# Altium PCB ZD-STM32-ZOUYU.PcbDoc (part 2 of 8)
Units mm, origin at the board's own origin, x right, y up, seen from the top; angles counter-clockwise.
Board outline 251.84 x 139.06 mm, 2 copper layers (Top Layer, Bottom Layer); 254 components, 246 nets, 1172 pads, 599 vias.
Unrouted connection lines stored in the file: 9.
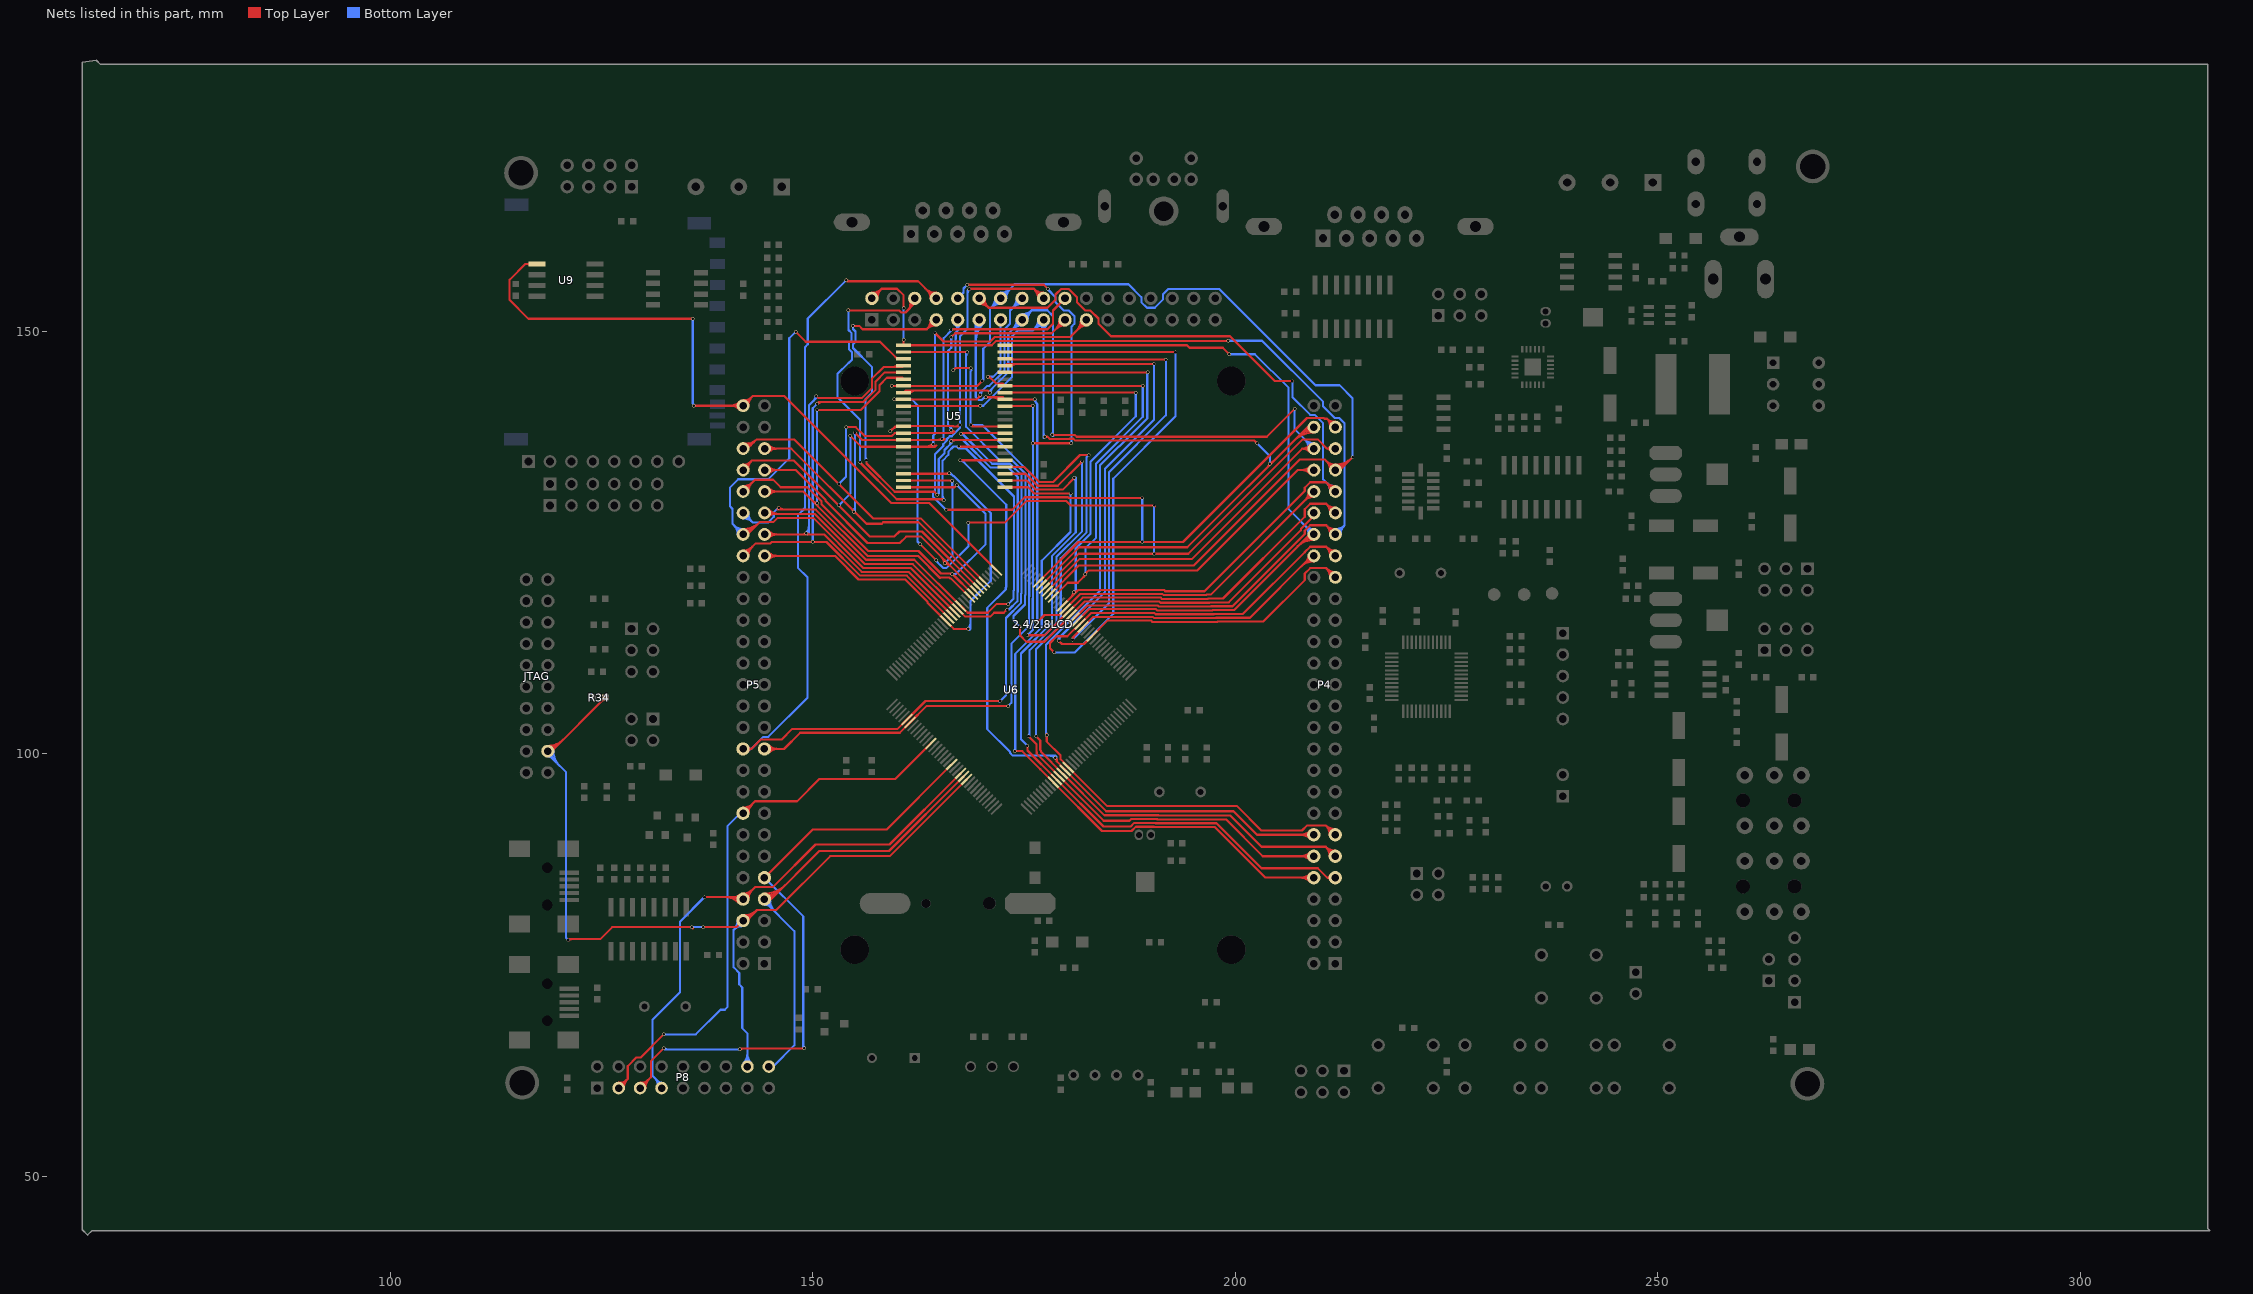
[diagram p2: the nets of this part, all layers, seen from the top]

## Via types
v1: diameter 0.4, hole 0.3, Top Layer to Bottom Layer, 598 vias
v2: diameter 0.3, hole 0.2, Top Layer to Bottom Layer, 1 vias

## Nets (pads, with @x,y where several pads share a name; then routed paths per layer and width w, separated by ;. In a path a pad name is that pad's centre, name@x,y a point inside that pad or via, vN(x,y) a via of type N, cw(c..) or ccw(c..) an arc to the next point about the centre after c; other vN are vias at no path point) (continued)
"F CS": P5.54 U6.73 U9.1 | length 92.8
  Top Layer w0.254: U9.1@116.511,157.862 ccw(c116.208,157.559) 116.208,157.988 ccw(c116.208,158.417) U9.1@116.511,158.114 ; U9.1@117.348,157.988 115.946,157.988 114.098,156.141 114.098,153.725 116.312,151.511 v1(135.763,151.511) ; v1(135.89,141.224) P5.54@141.732,141.224 142.875,142.367 146.614,142.367 157.048,131.933 157.048,131.921 159.267,129.702 163.778,129.702 U6.73@171.73,121.749 ; P5.54@141.283,140.775 ccw(c140.199,139.691) 140.199,141.224 ccw(c140.199,142.757) P5.54@141.283,141.673 ; P5.54@141.463,140.955 ccw(c140.812,140.304) 140.812,141.224 ccw(c140.812,142.144) P5.54@141.463,141.493 ; P5.54@141.732,141.605 ccw(c141.732,142.525) 142.382,141.874 ccw(c143.033,141.224) P5.54@142.113,141.224 ; P5.54@141.732,141.859 ccw(c141.732,143.392) 142.816,142.308 ccw(c143.9,141.224) P5.54@142.367,141.224
  Bottom Layer w0.254: 135.763,141.478 v1(135.763,151.511) ; 135.763,141.707 ccw(c136.373,141.707) v1@135.942,141.276
"FIFO OE": P5.8 P8.7 U6.132 | length 73.8
  Top Layer w0.254: v1(137.16,83.058) 141.478,83.058 P5.8@141.721,82.815 143.147,84.24 145.25,84.24 150.291,89.281 159.061,89.281 U6.132@167.488,97.708 ; 139.54,83.058 cw(c139.54,80.633) P5.8@141.254,82.348 ; 140.153,83.058 cw(c140.153,81.247) P5.8@141.434,82.527 ; 140.714,83.058 ccw(c140.714,83.822) P5.8@141.254,83.282 ; 140.766,83.058 cw(c140.766,81.86) P5.8@141.613,82.707 ; P5.8@141.721,83.221 ccw(c141.721,84.202) 142.415,83.509 ccw(c143.109,82.815) P5.8@142.128,82.815 ; P5.8@141.721,83.475 ccw(c141.721,85.07) 142.849,83.942 ccw(c143.976,82.815) P5.8@142.382,82.815
  Bottom Layer w0.254: 131.225,61.693 cw(c130.049,60.517) P8.7@131.711,60.464 ; 131.64,61.278 cw(c130.852,60.491) P8.7@131.965,60.456 ; 131.675,61.243 ccw(c132.08,61.647) P8.7@132.08,61.075 ; P8.7@132.08,60.452 132.08,60.838 131.003,61.915 131.003,68.519 134.258,71.774 134.258,80.156 v1(137.16,83.058)
"FIFO RCLK": JTAG.3 P5.6 P8.16 R34.2 U6.134 | length 129.9
  Top Layer w0.254: JTAG.3@118.618,100.33 119.064,100.33 R34.2@125.412,106.678 ; JTAG.3@118.655,100.445 ccw(c118.655,101.709) 119.549,100.815 ; JTAG.3@118.655,100.699 ccw(c118.655,102.577) 119.983,101.249 ; JTAG.3@118.655,100.953 ccw(c118.655,103.444) 120.417,101.683 ; JTAG.3@119.278,100.33 cw(c119.796,100.33) 119.43,100.696 ; v1(121.031,77.978) 121.128,78.075 124.811,78.075 126.238,79.502 v1(135.636,79.502) v1@135.763,79.375 ; v1@121.083,77.926 cw(c121.441,77.568) 121.441,78.075 ; R34.2@125.158,106.678 cw(c124.545,106.678) 124.979,106.245 cw(c125.412,105.811) R34.2@125.412,106.424 ; v1(137.033,79.502) 140.948,79.502 P5.6@141.721,80.275 142.124,80.275 143.383,81.534 ; P5.6@141.732,80.427 ccw(c141.813,81.534) 142.598,80.749 ; P5.6@141.751,80.68 ccw(c141.867,82.265) 142.99,81.141 ; P5.6@141.769,80.933 ccw(c141.92,82.997) 143.383,81.534 ; P5.6@142.382,80.275 cw(c143.004,80.275) 142.564,80.715 ; U6.134@168.195,97.001 159.097,87.903 152.038,87.903 145.669,81.534 143.383,81.534
  Bottom Layer w0.254: JTAG.3@118.618,100.33 118.618,99.981 120.777,97.822 120.777,78.232 v1(121.031,77.978) ; JTAG.3@118.655,99.707 cw(c118.655,99.135) 119.06,99.539 ; JTAG.3@118.77,100.33 ccw(c119.98,100.33) 119.125,99.475 ; JTAG.3@119.024,100.33 ccw(c120.847,100.33) 119.558,99.041 ; JTAG.3@119.278,100.33 ccw(c121.714,100.33) 119.992,98.608 ; v1(135.636,79.502) v1(137.033,79.502) 137.287,79.502 ; P5.6@141.061,80.269 cw(c139.511,80.257) 140.607,79.16 ; P5.6@141.315,80.271 cw(c140.361,80.264) 141.035,79.589 cw(c141.71,78.915) P5.6@141.718,79.868 ; P5.6@141.716,79.614 ccw(c141.703,78.064) 140.607,79.16 ; P5.6@141.721,80.275 140.607,79.16 ; P8.16@141.799,63.433 ccw(c140.736,64.496) 142.24,64.496 ccw(c143.744,64.496) P8.16@142.681,63.433 ; P8.16@141.979,63.253 ccw(c141.349,63.883) 142.24,63.883 ccw(c143.131,63.883) P8.16@142.501,63.253 ; P8.16@142.24,62.992 142.24,66.929 141.624,67.545 141.624,72.364 141.267,72.721 141.267,74.073 140.607,74.733 140.607,79.16
"FIFO RRST": P5.9 P8.5 U6.129 | length 77.7
  Top Layer w0.254: P8.5@129.54,60.452 130.81,61.722 130.81,63.627 v1(132.334,65.151) ; P8.5@129.54,60.821 ccw(c129.54,61.712) 130.17,61.082 ccw(c130.8,60.452) P8.5@129.909,60.452 ; P8.5@129.54,61.075 ccw(c129.54,62.579) 130.604,61.516 ccw(c131.667,60.452) P8.5@130.163,60.452 ; v1(141.351,65.024) 141.478,65.151 v1(148.971,65.151) ; v1@141.403,64.972 cw(c141.834,64.541) 141.834,65.151 ; P5.9@144.261,85.355 149.965,91.059 158.718,91.059 U6.129@166.427,98.769
  Bottom Layer w0.254: v1(132.334,65.151) 132.461,65.024 v1(141.351,65.024) ; v1@132.386,65.203 ccw(c132.817,65.634) 132.817,65.024 ; P5.9@144.261,85.355 148.844,80.772 148.844,65.278 v1(148.971,65.151) ; 148.844,65.634 ccw(c149.454,65.634) v1@149.023,65.203
"FIFO WEN": P5.7 P8.18 U6.133 | length 65
  Top Layer w0.254: P5.7@144.261,82.713 ccw(c144.261,84.36) 145.425,83.195 ; P5.7@144.261,82.815 145.045,82.815 150.749,88.519 159.006,88.519 U6.133@167.841,97.354 ; P5.7@144.261,82.967 ccw(c144.261,85.227) 145.859,83.629 ; P5.7@144.261,83.221 ccw(c144.261,86.094) 146.293,84.063 ; P5.7@144.261,83.475 ccw(c144.261,86.961) 146.726,84.496
  Bottom Layer w0.254: P5.7@144.261,82.154 cw(c144.261,81.173) 144.955,81.867 ; P5.7@144.261,82.815 144.261,82.561 147.797,79.025 147.797,65.518 145.271,62.992 P8.18@144.78,62.992 ; P5.7@144.414,82.815 ccw(c145.395,82.815) 144.701,82.121 ; P5.7@144.668,82.815 ccw(c146.262,82.815) 145.135,81.687 ; P5.7@144.922,82.815 ccw(c147.129,82.815) 145.568,81.254
"FIFO WRST": P5.16 P8.3 U6.122 | length 75.1
  Top Layer w0.254: P8.3@127,60.452 128.077,61.529 128.077,63.052 129.094,64.069 129.601,64.069 v1(132.334,66.802) ; P8.3@127,60.821 ccw(c127,61.712) 127.63,61.082 ccw(c128.26,60.452) P8.3@127.369,60.452 ; P8.3@127,61.075 ccw(c127,62.579) 128.064,61.516 ccw(c129.127,60.452) P8.3@127.623,60.452 ; P5.16@141.721,92.975 143.147,94.4 148.121,94.4 150.749,97.028 159.737,97.028 U6.122@163.952,101.243 ; P5.16@141.721,93.381 ccw(c141.721,94.362) 142.415,93.669 ccw(c143.109,92.975) P5.16@142.128,92.975 ; P5.16@141.721,93.635 ccw(c141.721,95.23) 142.849,94.102 ccw(c143.976,92.975) P5.16@142.382,92.975
  Bottom Layer w0.254: v1(132.334,66.802) 136.144,66.802 139.063,69.721 139.554,69.721 139.863,70.03 139.863,91.459 141.379,92.975 P5.16@141.721,92.975
"FSMC A0": P4.10 U5.1 U6.10 | length 87.7
  Top Layer w0.254: U5.1@172.729,131.571 175.474,131.571 176.21,130.836 v1(180.493,130.836) ; v1(173.863,100.33) 174.765,100.33 176.911,98.184 U6.10@178.448,96.647 184.22,90.875 187.713,90.875 188.224,91.386 190.338,91.386 190.376,91.348 197.57,91.348 203.563,85.355 P4.10@209.285,85.355 ; P4.10@208.818,84.888 ccw(c207.691,83.76) 207.691,85.355 ccw(c207.691,86.949) P4.10@208.818,85.822 ; P4.10@208.998,85.067 ccw(c208.304,84.374) 208.304,85.355 ccw(c208.304,86.336) P4.10@208.998,85.642
  Bottom Layer w0.254: v1@173.811,100.382 ccw(c173.511,100.682) 173.936,100.682 ; v1(173.863,100.33) 173.936,100.403 173.936,111.85 177.076,114.99 177.076,122.861 180.493,126.278 v1(180.493,130.836)
"FSMC A1": P4.9 U5.2 U6.11 | length 89.1
  Top Layer w0.254: U5.2@172.729,132.371 175.316,132.371 176.398,131.29 179.55,131.29 v1@180.975,132.715 ; v1(175.387,100.965) 175.387,100.415 U6.11@178.801,97.001 184.383,91.419 187.615,91.419 188.036,91.84 190.526,91.84 190.564,91.802 197.758,91.802 203.091,86.469 209.747,86.469 210.861,85.355 ; P4.9@211.209,85.116 ccw(c210.861,84.981) 210.861,85.355 ; P4.9@211.209,85.593 cw(c210.861,85.728) 210.861,85.355 ; P4.9@211.825,85.355 210.861,85.355
  Bottom Layer w0.254: v1(175.387,100.965) 174.625,101.727 174.625,111.897 178.308,115.58 178.308,123.451 181.102,126.245 v1@181.102,132.715 ; v1@180.884,132.624 cw(c180.356,132.096) 181.102,132.096
  other v1: 180.935,132.675
"FSMC A2": P4.12 U5.3 U6.12 | length 91.4
  Top Layer w0.254: U5.3@172.729,133.171 175.158,133.171 176.586,131.744 178.988,131.744 v1(181.864,134.62) v1@181.744,134.62 ; v1(175.514,102.108) 176.457,101.165 176.457,100.052 176.53,99.979 ; 176.53,100.203 176.53,99.979 ; P4.12@208.818,87.428 ccw(c207.691,86.3) 207.691,87.895 ccw(c207.691,89.489) P4.12@208.818,88.362 ; P4.12@208.998,87.607 ccw(c208.304,86.914) 208.304,87.895 ccw(c208.304,88.876) P4.12@208.998,88.182 ; P4.12@209.285,87.895 203.246,87.895 198.885,92.256 190.752,92.256 190.714,92.294 187.664,92.294 187.46,92.09 184.419,92.09 U6.12@179.155,97.354 176.53,99.979
  Bottom Layer w0.254: v1@175.462,102.16 ccw(c175.031,102.591) 175.641,102.591 ; v1(175.514,102.108) 175.641,102.235 175.641,112.271 178.816,115.446 178.816,123.317 181.864,126.365 v1(181.864,134.62)
"FSMC A3": P4.11 U5.4 U6.13 | length 93.8
  Top Layer w0.254: U5.4@172.729,133.971 175,133.971 176.774,132.198 178.426,132.198 181.61,135.382 v1(182.626,135.382) ; v1(176.403,102.108) 176.911,101.6 176.911,100.464 176.984,100.391 176.984,100.257 179.509,97.732 U6.13@179.509,97.708 179.533,97.708 184.493,92.748 190.902,92.748 190.94,92.71 199.39,92.71 203.091,89.009 210.711,89.009 ; P4.11@211.165,87.9 ccw(c209.615,87.913) 210.711,89.009 ; P4.11@211.419,87.898 ccw(c210.465,87.906) 211.139,88.581 ccw(c211.814,89.255) P4.11@211.822,88.301 ; P4.11@211.82,88.555 cw(c211.807,90.105) 210.711,89.009 ; P4.11@211.825,87.895 210.711,89.009
  Bottom Layer w0.254: v1(176.403,102.108) 176.403,112.391 179.324,115.312 179.324,123.183 182.391,126.25 182.391,135.147 v1(182.626,135.382)
"FSMC A4": P4.14 U5.5 U6.14 | length 91.1
  Top Layer w0.254: v1@167.386,134.747 v1(167.41,134.771) U5.5@172.729,134.771 ; v1@178.647,99.508 cw(c178.355,99.095) 178.861,99.095 ; v1(178.689,99.568) 178.861,99.396 178.861,99.127 179.862,98.126 U6.14@179.862,98.061 184.706,93.218 199.771,93.218 202.554,90.435 P4.14@209.285,90.435 ; P4.14@208.818,89.968 ccw(c207.691,88.84) 207.691,90.435 ccw(c207.691,92.029) P4.14@208.818,90.902 ; P4.14@208.998,90.147 ccw(c208.304,89.454) 208.304,90.435 ccw(c208.304,91.416) P4.14@208.998,90.722
  Bottom Layer w0.254: v1@167.41,134.698 cw(c167.41,133.993) 167.909,134.492 ; v1(167.41,134.771) 167.63,134.771 172.885,129.516 172.885,119.771 172.812,119.698 172.812,119.472 170.634,117.294 170.634,102.941 173.336,100.239 173.336,100.112 173.645,99.803 178.581,99.803 v1@178.816,99.568 ; 177.945,99.803 cw(c177.945,98.824) v1@178.637,99.516 ; 178.559,99.803 cw(c178.559,99.438) v1@178.817,99.696 ; v1(178.689,99.568) v1@178.816,99.568 ; v1@178.752,99.504 v1@178.816,99.568
"FSMC A5": P4.13 U5.18 U6.15 | length 110.1
  Top Layer w0.254: U5.18@172.729,145.171 v1@189.601,145.171 ; v1@177.673,102.362 v1(177.673,102.235) 177.673,101.456 179.315,99.814 179.315,99.381 180.216,98.48 U6.15@180.216,98.415 180.223,98.415 184.785,93.853 200.152,93.853 203.073,90.932 207.884,90.932 208.502,91.549 210.711,91.549 ; 189.41,145.171 cw(c189.41,144.96) v1@189.559,145.109 ; P4.13@211.165,90.44 ccw(c209.615,90.453) 210.711,91.549 ; P4.13@211.419,90.438 ccw(c210.465,90.446) 211.139,91.121 ccw(c211.814,91.795) P4.13@211.822,90.841 ; P4.13@211.82,91.095 cw(c211.807,92.645) 210.711,91.549 ; P4.13@211.825,90.435 210.711,91.549
  Bottom Layer w0.254: 177.581,102.633 ccw(c178.071,102.633) v1@177.725,102.287 ; v1(177.673,102.235) 177.581,102.327 177.581,112.927 183.969,119.315 183.969,134.185 186.182,136.398 186.267,136.398 189.569,139.7 189.569,145.119 v1(189.611,145.161) ; 189.569,144.882 cw(c189.89,144.882) v1@189.663,145.109
"FSMC A6": P4.37 U5.19 U6.50 | length 99
  Top Layer w0.254: U5.19@172.729,145.971 172.93,146.172 v1@190.373,146.172 ; U5.19@173.276,146.069 cw(c173.465,145.949) 173.465,146.172 ; U5.19@173.301,146.099 cw(c173.476,145.924) 173.476,146.172 ; U5.19@173.481,145.92 cw(c174.089,145.311) 174.089,146.172 ; U5.19@173.491,145.932 cw(c173.928,145.652) 173.928,146.172 ; v1(179.07,113.411) 179.47,113.011 182.084,113.011 U6.50@183.044,113.971 184.849,115.776 190.037,115.776 190.192,115.621 197.846,115.621 197.901,115.675 203.305,115.675 208.207,120.577 208.207,121.355 208.845,121.993 210.747,121.993 P4.37@211.836,120.904 ; P4.37@211.201,120.904 ccw(c209.668,120.904) 210.752,121.988 ccw(c211.836,123.072) P4.37@211.836,121.539 ; P4.37@211.455,120.904 ccw(c210.535,120.904) 211.186,121.554 ccw(c211.836,122.205) P4.37@211.836,121.285
  Bottom Layer w0.254: v1(179.07,113.411) 179.07,113.665 184.585,119.18 184.585,133.785 190.373,139.573 v1(190.373,146.177) ; v1@179.143,113.411 cw(c179.932,113.411) 179.374,113.969
"FSMC A7": P4.40 U5.20 U6.53 | length 94.4
  Top Layer w0.254: U5.20@172.729,146.771 172.796,146.704 191.751,146.704 v1(191.77,146.685) ; U5.20@173.481,146.823 ccw(c173.768,147.11) 173.768,146.704 ; v1(180.721,113.538) 180.721,113.769 U6.53@181.983,115.032 183.181,116.23 190.225,116.23 190.38,116.075 197.658,116.075 197.713,116.129 201.727,116.129 209.042,123.444 P4.40@209.296,123.444 ; v1@180.794,113.538 cw(c181.529,113.538) 181.009,114.058 ; 191.548,146.704 cw(c191.548,146.463) v1@191.718,146.633 ; 207.778,122.18 cw(c209.296,120.663) P4.40@209.296,122.809 ; 208.212,122.614 cw(c209.296,121.53) P4.40@209.296,123.063 ; 208.392,122.794 ccw(c207.741,123.444) P4.40@208.661,123.444
  Bottom Layer w0.254: v1(180.721,113.538) 185.039,117.856 185.039,133.35 191.77,140.081 v1(191.77,146.685)
"FSMC A8": P4.39 U5.21 U6.54 | length 107.4
  Top Layer w0.254: U5.21@172.729,147.571 v1(192.913,147.571) ; v1(178.562,112.014) 178.054,112.522 178.054,113.14 178.852,113.938 180.117,113.938 181.565,115.385 U6.54@181.63,115.385 182.928,116.684 190.413,116.684 190.568,116.529 197.47,116.529 197.525,116.583 200.911,116.583 208.207,123.879 208.207,123.895 208.845,124.533 210.747,124.533 P4.39@211.836,123.444 ; P4.39@211.201,123.444 ccw(c209.668,123.444) 210.752,124.528 ccw(c211.836,125.612) P4.39@211.836,124.079 ; P4.39@211.455,123.444 ccw(c210.535,123.444) 211.186,124.094 ccw(c211.836,124.745) P4.39@211.836,123.825
  Bottom Layer w0.254: v1(178.562,112.014) 180.975,112.014 185.547,116.586 185.547,132.595 192.913,139.961 v1(192.913,147.571)
"FSMC A9": P4.42 U5.22 U6.55 | length 95.8
  Top Layer w0.254: U5.22@172.729,148.371 194.275,148.371 194.564,148.082 198.501,148.082 v1(199.263,147.32) ; U6.55@181.276,115.739 182.675,117.138 190.602,117.138 190.756,116.983 197.282,116.983 197.337,117.037 199.848,117.037 208.795,125.984 P4.42@209.296,125.984 ; 207.357,124.546 cw(c209.296,122.607) P4.42@209.296,125.349 ; 207.79,124.979 cw(c209.296,123.474) P4.42@209.296,125.603 ; 208.224,125.413 cw(c209.296,124.341) P4.42@209.296,125.857 ; 208.566,125.755 ccw(c208.337,125.984) P4.42@208.661,125.984
  Bottom Layer w0.254: v1(199.263,147.32) 202.311,147.32 206.302,143.329 206.302,128.978 P4.42@209.296,125.984 ; P4.42@208.661,125.984 ccw(c207.128,125.984) 208.212,127.068 ccw(c209.296,128.152) P4.42@209.296,126.619 ; P4.42@208.915,125.984 ccw(c207.995,125.984) 208.646,126.634 ccw(c209.296,127.285) P4.42@209.296,126.365
"FSMC A10": 2.4/2.8LCD.2 P4.41 U5.23 U6.56 | length 129.1
  Top Layer w0.254: 2.4/2.8LCD.2@156.972,153.924 158.115,155.067 159.945,155.067 160.729,154.283 v1@160.729,152.908 ; 2.4/2.8LCD.2@156.972,154.33 ccw(c156.972,155.312) 157.666,154.618 ccw(c158.36,153.924) 2.4/2.8LCD.2@157.378,153.924 ; 2.4/2.8LCD.2@156.972,154.584 ccw(c156.972,156.179) 158.099,155.051 ccw(c159.227,153.924) 2.4/2.8LCD.2@157.632,153.924 ; U5.23@160.729,148.371 v1(160.729,149.045) v1@160.782,149.098 ; U5.23@160.729,148.371 171.166,148.371 171.694,148.898 199.117,148.898 v1(199.136,148.917) ; U6.56@180.923,116.093 180.988,116.093 182.487,117.592 190.79,117.592 190.944,117.437 197.094,117.437 197.149,117.491 199.66,117.491 208.207,126.038 208.207,126.435 208.845,127.073 210.747,127.073 P4.41@211.836,125.984 ; 198.915,148.898 ccw(c198.915,149.138) v1@199.084,148.969 ; P4.41@211.201,125.984 ccw(c209.668,125.984) 210.752,127.068 ccw(c211.836,128.152) P4.41@211.836,126.619 ; P4.41@211.455,125.984 ccw(c210.535,125.984) 211.186,126.634 ccw(c211.836,127.285) P4.41@211.836,126.365
  Bottom Layer w0.254: v1(160.729,149.045) v1@160.729,152.908 ; v1(199.136,148.917) 203.143,148.917 210.385,141.675 210.385,141.135 211.747,139.773 212.287,139.773 212.925,139.135 212.925,127.073 P4.41@211.836,125.984 ; P4.41@211.836,126.365 ccw(c211.836,127.285) 212.486,126.634 ccw(c213.137,125.984) P4.41@212.217,125.984 ; P4.41@211.836,126.619 ccw(c211.836,128.152) 212.92,127.068 ccw(c214.004,125.984) P4.41@212.471,125.984
  other v1: 160.729,152.781
"FSMC A11": P4.44 U5.24 U6.57 | length 88.2
  Top Layer w0.254: U5.24@160.729,147.571 v1(168.272,147.571) v1@168.275,147.574 ; v1(174.498,115.062) 174.498,114.046 175.26,113.284 177.407,113.284 U6.57@180.569,116.446 182.169,118.046 190.978,118.046 191.132,117.891 196.906,117.891 196.961,117.945 199.225,117.945 207.753,126.473 207.753,126.623 209.296,128.166 P4.44@209.296,128.524
  Bottom Layer w0.254: 168.129,147.049 cw(c168.795,147.049) v1@168.324,147.52 ; v1(168.272,147.571) 168.129,147.428 168.129,138.72 172.048,134.801 173.516,134.801 175.155,133.162 175.155,118.831 175.098,118.774 175.098,118.364 175.098,117.694 173.736,116.332 173.736,115.824 v1(174.498,115.062)
"FSMC A12": P5.42 U5.25 U6.87 | length 83.7
  Top Layer w0.254: P5.42@141.732,125.984 142.24,125.984 143.691,127.435 145.304,127.435 145.812,127.943 150.032,127.943 155.963,122.012 161.568,122.012 U6.87@166.781,116.8 ; P5.42@141.732,126.111 ccw(c141.732,127.644) 142.816,126.56 ; P5.42@141.732,126.365 ccw(c141.732,128.511) 143.25,126.994 ; P5.42@141.732,126.619 ccw(c141.732,129.378) 143.683,127.427 ; v1(147.955,149.987) 149.143,148.799 157.938,148.799 159.967,146.771 U5.25@160.729,146.771 ; 159.798,146.94 ccw(c160.029,147.171) U5.25@160.029,146.844
  Bottom Layer w0.254: P5.42@141.097,125.984 ccw(c139.564,125.984) 140.648,127.068 ccw(c141.732,128.152) P5.42@141.732,126.619 ; P5.42@141.351,125.984 ccw(c140.431,125.984) 141.082,126.634 ccw(c141.732,127.285) P5.42@141.732,126.365 ; P5.42@141.732,125.984 140.481,127.235 140.481,129.003 140.189,129.295 140.189,131.553 141.151,132.515 144.723,132.515 147.193,134.985 147.193,149.225 v1(147.955,149.987)
"FSMC A13": P5.41 U5.26 U6.88 | length 63.1
  Top Layer w0.254: P5.41@144.272,125.984 151.349,125.984 155.775,121.558 161.315,121.558 U6.88@166.427,116.446 ; P5.41@144.541,125.715 cw(c145.192,125.064) 145.192,125.984 cw(c145.192,126.904) P5.41@144.541,126.253 ; P5.41@144.721,125.535 cw(c145.805,124.451) 145.805,125.984 cw(c145.805,127.517) P5.41@144.721,126.433 ; 148.742,125.984 ccw(c148.742,126.594) v1@149.173,126.163 ; v1@149.277,126.163 ccw(c149.708,126.594) 149.708,125.984 ; v1(150.368,142.367) 150.617,142.118 155.78,142.118 156.967,143.305 156.967,144.394 158.369,145.796 160.554,145.796 U5.26@160.729,145.971 ; 159.429,145.796 ccw(c159.429,146.571) U5.26@159.977,146.023
  Bottom Layer w0.254: v1@149.173,126.163 ccw(c148.351,126.985) 149.514,126.985 ; v1(149.225,126.111) 149.409,126.111 149.514,126.216 149.514,141.242 150.368,142.096 v1(150.368,142.367) ; v1@149.353,125.983 ccw(c148.964,126.372) 149.514,126.372 ; 150.052,141.78 ccw(c149.465,142.367) v1@150.295,142.367
"FSMC A14": P5.40 U5.27 U6.89 | length 62.8
  Top Layer w0.254: P5.40@141.732,123.444 143.183,124.895 144.923,124.895 145.123,125.095 151.596,125.095 155.587,121.104 161.101,121.104 166.074,116.132 U6.89@166.074,116.093 ; P5.40@141.732,123.825 ccw(c141.732,124.745) 142.382,124.094 ccw(c143.033,123.444) P5.40@142.113,123.444 ; P5.40@141.732,124.079 ccw(c141.732,125.612) 142.816,124.528 ccw(c143.9,123.444) P5.40@142.367,123.444 ; 149.746,125.095 ccw(c149.746,125.336) v1@149.916,125.166 ; v1@150.02,125.166 ccw(c150.19,125.336) 150.19,125.095 ; v1(150.495,141.478) 150.681,141.664 155.968,141.664 157.421,143.117 157.421,144.086 158.506,145.171 U5.27@160.729,145.171 ; v1@150.547,141.426 cw(c151.12,140.853) 151.12,141.664
  Bottom Layer w0.254: v1@149.987,125.095 v1(149.968,125.114) 149.968,140.934 150.495,141.461 v1(150.495,141.478) ; 150.359,141.325 ccw(c150.205,141.478) v1@150.422,141.478
"FSMC A15": P5.39 U5.42 U6.90 | length 60.5
  Top Layer w0.254: P5.39@144.272,123.444 152.605,123.444 155.399,120.65 160.913,120.65 163.56,118.003 163.56,117.899 U6.90@165.72,115.739 166.651,114.808 v1(168.402,114.808) ; P5.39@144.541,123.175 cw(c145.192,122.524) 145.192,123.444 cw(c145.192,124.364) P5.39@144.541,123.713 ; P5.39@144.721,122.995 cw(c145.805,121.911) 145.805,123.444 cw(c145.805,124.977) P5.39@144.721,123.893 ; U5.42@160.729,133.171 166.064,133.171 v1(166.116,133.223) ; 165.815,133.171 ccw(c165.815,133.524) v1@166.064,133.275
  Bottom Layer w0.254: v1@166.116,133.15 cw(c166.116,132.56) 166.533,132.977 ; v1(166.116,133.223) 166.287,133.223 166.628,132.882 166.694,132.882 171.052,128.524 171.052,120.506 168.656,118.11 168.656,114.808 ; v1@168.35,114.86 ccw(c167.613,115.597) 168.656,115.597 ; v1@168.53,114.68 ccw(c168.226,114.984) 168.656,114.984
"FSMC A16": P5.47 U5.43 U6.80 | length 54.2
  Top Layer w0.254: P5.47@144.272,133.604 147.945,133.604 151.476,130.073 151.476,129.956 156.464,124.968 160.274,124.968 161.029,125.723 162.807,125.723 U6.80@169.256,119.275 ; P5.47@144.541,133.335 cw(c145.192,132.684) 145.192,133.604 cw(c145.192,134.524) P5.47@144.541,133.873 ; P5.47@144.721,133.155 cw(c145.805,132.071) 145.805,133.604 cw(c145.805,135.137) P5.47@144.721,134.053 ; U5.43@160.729,132.371 v1@166.497,132.371 ; 165.224,123.306 cw(c164.473,122.555) v1@165.535,122.555 ; v1@165.608,122.482 cw(c165.608,121.42) 166.359,122.171 ; v1@165.608,122.736 cw(c165.608,122.287) 165.926,122.604 ; 165.657,122.873 cw(c165.34,122.555) v1@165.789,122.555 ; 166.23,132.371 cw(c166.23,132.067) v1@166.445,132.282
  Bottom Layer w0.254: v1(165.608,122.555) 166.497,123.444 166.497,131.589 166.478,131.608 166.478,132.315 v1(166.497,132.334) ; 166.478,132.112 cw(c166.719,132.112) v1@166.549,132.282
"FSMC A17": P5.46 U5.44 U6.81 | length 58.2
  Top Layer w0.254: P5.46@141.732,131.064 143.129,132.461 145.288,132.461 146.177,131.572 149.335,131.572 151.022,129.885 151.022,129.521 156.528,124.015 162.496,124.015 165.154,121.358 166.424,121.358 v1(166.497,121.285) ; P5.46@141.732,131.445 ccw(c141.732,132.365) 142.382,131.714 ccw(c143.033,131.064) P5.46@142.113,131.064 ; P5.46@141.732,131.699 ccw(c141.732,133.232) 142.816,132.148 ccw(c143.9,131.064) P5.46@142.367,131.064 ; U5.44@160.729,131.571 166.75,131.571 v1(167.005,131.826) ; 166.145,121.358 cw(c166.145,120.933) v1@166.445,121.233 ; v1@166.497,121.212 cw(c166.497,120.937) 166.692,121.131 ; v1@166.517,121.306 U6.81@168.902,118.921
  Bottom Layer w0.254: v1(166.497,121.285) 166.878,121.285 170.434,124.841 170.434,128.397 v1(167.005,131.826)
"FSMC A18": P5.45 U5.28 U6.82 | length 57.9
  Top Layer w0.254: P5.45@144.272,131.064 148.844,131.064 150.568,129.34 150.568,129.333 156.457,123.444 162.426,123.444 165.034,120.836 165.103,120.904 166.133,120.904 166.279,120.758 166.358,120.758 U6.82@168.548,118.567 U6.82@168.49,118.567 ; P5.45@144.541,130.795 cw(c145.192,130.144) 145.192,131.064 cw(c145.192,131.984) P5.45@144.541,131.333 ; P5.45@144.721,130.615 cw(c145.805,129.531) 145.805,131.064 cw(c145.805,132.597) P5.45@144.721,131.513 ; 149.937,129.971 ccw(c150.495,130.529) v1@150.495,129.74 ; v1(150.495,140.716) 155.662,140.716 157.875,142.929 157.875,143.651 158.75,144.526 160.574,144.526 U5.28@160.729,144.371 ; 159.48,144.526 cw(c159.48,143.822) U5.28@159.977,144.32
  Bottom Layer w0.254: v1(150.495,129.667) v1(150.495,140.716)
"FSMC D0": 2.4/2.8LCD.6 P5.44 U5.7 U6.85 | length 125
  Top Layer w0.254: P5.44@141.732,128.524 P5.44@142.094,128.524 ; v1@145.795,129.031 ccw(c146.06,129.296) 146.06,128.921 ; v1@145.975,129.211 ccw(c146.673,129.909) 146.673,128.921 ; 146.034,128.921 150.337,128.921 156.269,122.99 162.005,122.99 U6.85@167.488,117.507 167.52,117.507 168.32,116.707 170.682,116.707 171.704,117.729 v1(173.101,117.729) ; v1(154.178,152.527) 154.207,152.498 160.218,152.498 160.462,152.254 160.947,152.254 162.052,153.359 2.4/2.8LCD.6@162.052,153.924 ; v1@154.23,152.579 ccw(c154.423,152.772) 154.423,152.498 ; v1(155.575,134.503) 159.922,130.156 v1@165.373,130.156 ; 161.23,152.537 ccw(c160.508,153.258) 2.4/2.8LCD.6@161.446,153.663 ; 161.495,152.801 ccw(c160.878,153.418) 2.4/2.8LCD.6@161.679,153.763 ; 161.759,153.066 ccw(c161.248,153.577) 2.4/2.8LCD.6@161.912,153.864 ; 165.044,130.156 cw(c165.044,129.611) v1@165.429,129.996 ; v1@167.286,136.371 U5.7@172.729,136.371 ; v1@167.311,136.45 ccw(c167.499,136.638) 167.499,136.371
  Bottom Layer w0.254: P5.44@141.732,127.889 cw(c141.732,126.356) 142.816,127.44 cw(c143.9,128.524) P5.44@142.367,128.524 ; P5.44@141.732,128.143 cw(c141.732,127.223) 142.382,127.874 cw(c143.033,128.524) P5.44@142.113,128.524 ; P5.44@141.732,128.524 142.875,127.381 144.669,127.381 145.361,128.073 145.361,128.597 v1(145.923,129.159) ; v1@154.126,152.475 cw(c153.94,152.289) 154.204,152.289 ; v1@154.204,152.501 154.204,150.189 154.578,149.815 154.578,148.98 154.277,148.679 154.277,147.866 154.632,147.511 154.632,146.685 154.256,146.309 ; 154.237,146.309 152.913,144.985 152.913,142.235 155.575,139.573 v1(155.575,134.503) ; 165.349,130.544 ccw(c165.977,130.544) v1@165.533,130.1 ; v1(165.481,130.048) 165.349,130.18 165.349,134.725 166.032,135.409 166.032,135.79 166.641,136.398 v1(167.259,136.398) ; v1@167.131,136.27 ccw(c167.389,136.528) 167.389,136.163 ; 167.259,136.163 168.112,136.163 173.793,130.482 173.793,119.395 173.736,119.338 173.736,118.364 v1(173.101,117.729) ; v1@167.311,136.45 ccw(c168.003,137.142) 168.003,136.163
"FSMC D1": 2.4/2.8LCD.7 P5.43 U5.8 U6.86 | length 121.7
  Top Layer w0.254: P5.43@144.272,128.524 144.399,128.397 150.22,128.397 156.151,122.466 161.821,122.466 U6.86@167.134,117.153 168.035,116.253 170.99,116.253 171.45,116.713 172.593,116.713 v1(172.974,117.094) ; P5.43@144.541,128.793 ccw(c145.498,129.75) 145.498,128.397 ccw(c145.498,127.298) P5.43@144.721,128.075 ; P5.43@144.721,128.973 ccw(c146.112,130.364) 146.112,128.397 ; v1(154.731,150.667) 155.461,150.667 155.858,150.27 163.478,150.27 ; v1(156.337,134.747) 156.337,134.383 159.675,131.044 164.358,131.044 v1(164.719,130.683) ; 2.4/2.8LCD.7@163.932,151.379 cw(c162.382,151.366) 163.478,150.27 ; 2.4/2.8LCD.7@164.186,151.381 cw(c163.232,151.373) 163.906,150.698 cw(c164.581,150.024) 2.4/2.8LCD.7@164.589,150.978 ; 2.4/2.8LCD.7@164.587,150.724 ccw(c164.574,149.174) 163.478,150.27 ; 2.4/2.8LCD.7@164.592,151.384 163.478,150.27 ; v1(166.37,137.033) 166.37,137.16 166.381,137.171 U5.8@172.729,137.171 ; v1@166.422,136.981 cw(c166.88,136.523) 166.88,137.171
  Bottom Layer w0.254: v1@154.813,150.749 v1(154.731,150.667) 154.731,150.304 155.032,150.003 155.032,148.792 154.731,148.491 154.731,148.054 156.967,145.818 156.967,142.736 156.21,141.979 156.21,134.874 v1(156.337,134.747) ; 156.21,135.23 ccw(c156.82,135.23) v1@156.389,134.799 ; v1(164.719,130.683) 164.895,130.859 164.895,134.913 165.578,135.597 165.578,135.978 166.37,136.769 v1(166.37,137.033) 166.37,137.16 167.757,137.16 171.024,133.893 173.14,133.893 174.247,132.786 174.247,119.207 174.19,119.15 174.19,118.073 173.211,117.094 v1(172.974,117.094) ; 166.059,136.458 ccw(c165.484,137.033) v1@166.297,137.033 ; v1@166.422,136.981 cw(c166.853,136.55) 166.853,137.16
"FSMC D2": 2.4/2.8LCD.8 P5.22 U5.9 U6.114 | length 156.1
  Top Layer w0.254: P5.22@141.721,100.595 142.685,100.595 ; P5.22@142.337,100.356 cw(c142.685,100.221) 142.685,100.595 ; P5.22@142.337,100.833 ccw(c142.685,100.968) 142.685,100.595 ; v1(153.924,156.083) 154.051,155.956 162.45,155.956 164.482,153.924 2.4/2.8LCD.8@164.592,153.924 ; v1@153.976,156.135 ccw(c154.407,156.566) 154.407,155.956 ; 163.276,155.129 ccw(c164.592,156.445) 2.4/2.8LCD.8@164.592,154.584 ; 163.543,154.863 cw(c162.604,153.924) 2.4/2.8LCD.8@163.932,153.924 ; 163.71,154.696 ccw(c164.592,155.578) 2.4/2.8LCD.8@164.592,154.33 ; 163.976,154.429 cw(c163.471,153.924) 2.4/2.8LCD.8@164.186,153.924 ; v1(167.513,137.922) 167.562,137.971 U5.9@172.729,137.971 ; v1@167.565,137.87 cw(c167.809,137.626) 167.809,137.971 ; v1(172.179,106.266) 163.318,106.266 U6.114@161.124,104.072 160.022,102.97 147.547,102.97 146.286,101.709 143.8,101.709 142.685,100.595
  Bottom Layer w0.254: P5.22@141.721,100.595 142.685,100.595 ; P5.22@142.337,100.356 cw(c142.685,100.221) 142.685,100.595 ; P5.22@142.337,100.833 ccw(c142.685,100.968) 142.685,100.595 ; v1(153.924,156.083) 149.39,151.549 149.39,148.487 149.06,148.157 149.06,129.121 148.209,128.27 148.209,122.047 149.352,120.904 149.352,106.65 144.723,102.02 144.111,102.02 142.685,100.595 ; v1@167.513,137.849 cw(c167.513,137.372) 167.85,137.709 ; v1(167.513,137.922) 167.637,137.922 171.212,134.347 173.328,134.347 174.701,132.974 174.701,119.019 174.644,118.962 174.644,117.885 172.847,116.088 172.847,106.934 v1(172.179,106.266) v1@172.085,106.172
"FSMC D3": 2.4/2.8LCD.9 P5.21 U5.10 U6.115 | length 94.3
  Top Layer w0.254: P5.21@144.261,100.595 146.569,100.595 148.49,102.516 160.276,102.516 U6.115@161.477,103.718 163.423,105.664 v1(173.101,105.664) ; P5.21@144.549,100.307 cw(c145.242,99.614) 145.242,100.595 cw(c145.242,101.576) P5.21@144.549,100.882 ; P5.21@144.728,100.128 cw(c145.856,99) 145.856,100.595 cw(c145.856,102.189) P5.21@144.728,101.062 ; v1(166.624,145.415) 166.878,145.669 v1(168.656,145.669) ; v1(168.656,138.938) 168.823,138.771 U5.10@172.729,138.771 ; v1@168.708,138.99 ccw(c169.234,139.516) 169.234,138.771
  Bottom Layer w0.254: v1(166.624,145.415) 166.878,145.669 166.878,149.115 166.897,149.134 166.897,149.879 167.132,150.114 ; 2.4/2.8LCD.9@166.753,150.843 cw(c166.241,150.114) 167.132,150.114 ; 2.4/2.8LCD.9@167.132,151.384 167.132,150.114 ; 2.4/2.8LCD.9@167.511,150.843 ccw(c168.023,150.114) 167.132,150.114 ; 168.783,145.415 168.656,145.288 v1(168.656,138.938) 170.021,138.938 175.609,133.35 175.609,118.642 175.552,118.585 175.552,115.1 173.482,113.03 173.482,106.045 v1(173.101,105.664)
"FSMC D4": 2.4/2.8LCD.10 P4.43 U5.13 U6.58 | length 116.4
  Top Layer w0.254: v1(168.254,155.538) 177.329,155.538 v1(177.8,155.067) ; U5.13@172.729,141.171 175.969,141.171 v1(176.022,141.224) ; v1(175.387,114.046) 177.419,114.046 180.173,116.8 U6.58@180.216,116.8 181.916,118.5 191.166,118.5 191.321,118.345 196.718,118.345 196.772,118.399 198.536,118.399 208.207,128.07 208.207,128.975 208.845,129.613 210.747,129.613 P4.43@211.836,128.524 ; 175.719,141.171 ccw(c175.719,141.527) v1@175.97,141.276 ; v1(176.022,136.779) v1(180.594,136.779) ; P4.43@211.201,128.524 ccw(c209.668,128.524) 210.752,129.608 ccw(c211.836,130.692) P4.43@211.836,129.159 ; P4.43@211.455,128.524 ccw(c210.535,128.524) 211.186,129.174 ccw(c211.836,129.825) P4.43@211.836,128.905
  Bottom Layer w0.254: 2.4/2.8LCD.10@167.132,153.924 167.821,154.613 167.821,155.104 v1(168.254,155.538) ; v1(175.387,114.046) 176.022,114.681 176.022,118.413 176.063,118.454 176.063,141.183 v1(176.022,141.224) ; v1@175.97,136.727 cw(c175.747,136.504) 176.063,136.504 ; v1@175.97,136.831 ccw(c175.747,137.054) 176.063,137.054 ; v1@175.97,141.172 cw(c175.747,140.949) 176.063,140.949 ; v1@177.762,155.029 178.718,154.074 178.718,153.462 179.682,152.498 180.294,152.498 180.946,151.846 180.946,150.922 180.594,150.57 v1(180.594,136.779) ; v1@177.873,155.067 ccw(c178.23,155.067) 177.978,154.814
"FSMC D5": 2.4/2.8LCD.11 P4.46 U5.14 U6.59 | length 94.8
  Top Layer w0.254: v1(170.434,142.24) 170.453,142.221 172.479,142.221 U5.14@172.729,141.971 v1(176.261,141.971) v1@176.276,141.986 ; v1@170.486,142.292 ccw(c170.656,142.462) 170.656,142.221 ; 171.25,142.221 cw(c171.25,141.193) U5.14@171.977,141.92 ; 171.863,142.221 cw(c171.863,141.806) U5.14@172.157,142.099 ; v1(176.549,115.589) 177.414,116.454 179.162,116.454 U6.59@179.862,117.153 181.663,118.954 191.354,118.954 191.509,118.799 196.53,118.799 196.584,118.853 197.085,118.853 P4.46@209.296,131.064 ; P4.46@208.661,131.064 cw(c207.128,131.064) 208.212,129.98 cw(c209.296,128.896) P4.46@209.296,130.429 ; P4.46@208.915,131.064 cw(c207.995,131.064) 208.646,130.414 cw(c209.296,129.763) P4.46@209.296,130.683
  Bottom Layer w0.254: 169.272,148.824 cw(c172.232,148.824) 2.4/2.8LCD.11@170.139,150.917 ; 169.272,149.437 cw(c171.619,149.437) 2.4/2.8LCD.11@169.959,151.097 ; 169.272,150.05 cw(c171.006,150.05) 2.4/2.8LCD.11@169.78,151.276 ; 169.272,150.664 cw(c170.392,150.664) 2.4/2.8LCD.11@169.6,151.456 ; 2.4/2.8LCD.11@169.672,151.384 169.272,150.984 169.272,142.252 169.611,141.913 169.987,141.913 v1@170.314,142.24 ; 170.105,142.031 cw(c170.434,141.701) v1@170.434,142.167 ; v1(176.261,141.971) 176.261,141.73 176.549,141.442 v1(176.549,115.589) v1@176.53,115.57 ; v1@176.331,141.95 ccw(c176.703,141.837) 176.428,141.563
"FSMC D6": 2.4/2.8LCD.12 P4.45 U5.15 U6.60 | length 154.3
  Top Layer w0.254: 2.4/2.8LCD.12@169.672,153.924 170.786,152.81 ; 2.4/2.8LCD.12@169.675,153.518 cw(c169.683,152.564) 170.358,153.238 cw(c171.032,153.913) 2.4/2.8LCD.12@170.078,153.921 ; 2.4/2.8LCD.12@169.677,153.264 cw(c169.69,151.714) 170.786,152.81 ; 2.4/2.8LCD.12@170.332,153.919 ccw(c171.882,153.906) 170.786,152.81 ; U5.15@172.729,142.771 v1(188.214,142.771) ; U6.60@179.509,117.507 181.41,119.408 ; 180.526,118.524 ccw(c179.923,119.126) v1@180.775,119.126 ; v1@180.836,118.945 ccw(c180.851,119.175) 181.014,119.012 ; v1@180.853,119.199 ccw(c180.901,119.916) 181.41,119.408 ; 180.959,118.957 ccw(c180.791,119.126) v1@181.029,119.126 ; v1(206.756,144.145) 204.653,144.145 199.354,149.444 185.276,149.444 183.798,150.922 183.798,151.534 182.834,152.498 182.222,152.498 181.258,153.462 181.258,154.074 180.294,155.038 179.37,155.038 178.718,154.386 178.718,153.774 177.754,152.81 170.786,152.81 ; P4.45@211.201,131.064 ccw(c209.668,131.064) 210.752,132.148 ccw(c211.836,133.232) P4.45@211.836,131.699 ; P4.45@211.455,131.064 ccw(c210.535,131.064) 211.186,131.714 ccw(c211.836,132.365) P4.45@211.836,131.445 ; P4.45@211.836,131.064 210.747,132.153 208.845,132.153 208.207,131.515 208.207,131.118 196.342,119.253 191.697,119.253 191.542,119.408 181.41,119.408
  Bottom Layer w0.254: v1(180.848,119.126) 181.102,119.38 181.102,124.319 182.845,126.062 182.845,134.585 188.214,139.954 v1(188.214,142.771) ; v1(206.756,144.145) 206.756,142.224 208.845,140.135 209.385,140.135 210.385,139.135 210.385,132.515 P4.45@211.836,131.064 ; P4.45@211.201,131.064 ccw(c209.668,131.064) 210.752,132.148 ccw(c211.836,133.232) P4.45@211.836,131.699 ; P4.45@211.455,131.064 ccw(c210.535,131.064) 211.186,131.714 ccw(c211.836,132.365) P4.45@211.836,131.445
"FSMC D7": 2.4/2.8LCD.13 P4.48 U5.16 U6.63 | length 93.9
  Top Layer w0.254: v1@170.688,144.58 cw(c170.688,143.928) 171.149,144.389 ; v1(170.688,144.653) 170.885,144.653 171.694,143.844 172.456,143.844 U5.16@172.729,143.571 ; U5.16@172.741,143.583 U5.16@172.729,143.571 ; U6.63@178.448,118.567 180.149,120.269 181.356,120.269 182.245,121.158 v1(182.245,121.285) 182.245,121.349 182.626,121.73 195.517,121.73 207.391,133.604 P4.48@209.296,133.604 ; 182.031,120.944 ccw(c181.689,121.285) v1@182.172,121.285 ; v1@182.318,121.285 cw(c182.648,121.285) 182.415,121.518 ; v1@189.103,143.51 v1(189.042,143.571) U5.16@172.729,143.571 ; P4.48@208.847,133.155 ccw(c207.763,132.071) 207.763,133.604 ccw(c207.763,135.137) P4.48@208.847,134.053 ; P4.48@209.027,133.335 ccw(c208.376,132.684) 208.376,133.604 ccw(c208.376,134.524) P4.48@209.027,133.873
  Bottom Layer w0.254: v1(170.688,144.653) 171.323,144.653 172.212,145.542 2.4/2.8LCD.13@172.212,151.384 ; v1(182.245,121.285) 182.245,124.333 183.515,125.603 183.515,134.373 189.042,139.9 v1(189.042,143.571)
"FSMC D8": 2.4/2.8LCD.14 P4.47 U5.29 U6.64 | length 140.2
  Top Layer w0.254: v1@159.258,143.51 v1(159.319,143.571) U5.29@160.729,143.571 169.479,143.571 v1(170.053,144.145) ; U6.64@178.094,118.921 181.474,122.301 195.072,122.301 207.645,134.874 210.566,134.874 P4.47@211.836,133.604 212.344,133.604 v1(213.868,135.128) ; P4.47@211.201,133.604 ccw(c209.668,133.604) 210.752,134.688 ccw(c211.836,135.772) 211.836,134.239 ccw(c211.836,136.998) v1@213.787,135.047 ; P4.47@211.455,133.604 ccw(c210.535,133.604) 211.186,134.254 ccw(c211.836,134.905) 211.836,133.985 ccw(c211.836,136.131) 213.354,134.614 ; P4.47@211.836,133.731 ccw(c211.836,135.264) 212.92,134.18
  Bottom Layer w0.254: v1@170.001,144.197 ccw(c169.616,144.582) 170.161,144.582 ; v1(170.053,144.145) 170.161,144.253 170.161,147.957 170.942,148.738 170.942,152.654 2.4/2.8LCD.14@172.212,153.924 173.882,155.594 187.358,155.594 188.878,154.074 188.878,153.462 189.53,152.81 190.454,152.81 191.418,153.774 191.418,154.386 192.07,155.038 198.074,155.038 209.475,143.637 212.344,143.637 213.868,142.113 v1(213.868,135.128) ; 2.4/2.8LCD.14@171.552,153.924 cw(c169.957,153.924) 171.085,152.797 cw(c172.212,151.669) 2.4/2.8LCD.14@172.212,153.264 ; 2.4/2.8LCD.14@171.806,153.924 cw(c170.824,153.924) 171.518,153.23 cw(c172.212,152.536) 2.4/2.8LCD.14@172.212,153.518 ; 2.4/2.8LCD.14@172.212,154.33 ccw(c172.212,155.312) 172.906,154.618 ccw(c173.6,153.924) 2.4/2.8LCD.14@172.618,153.924 ; 2.4/2.8LCD.14@172.212,154.584 ccw(c172.212,156.179) 173.339,155.051 ccw(c174.467,153.924) 2.4/2.8LCD.14@172.872,153.924
"FSMC D9": 2.4/2.8LCD.15 P4.50 U5.30 U6.65 | length 132.3
  Top Layer w0.254: U5.30@160.729,142.771 160.979,143.021 170.669,143.021 v1(170.942,142.748) ; U5.30@161.017,142.911 cw(c161.17,142.859) 161.17,143.021 ; U5.30@161.258,142.83 cw(c161.525,142.739) 161.525,143.021 ; U5.30@161.301,142.899 cw(c161.595,142.606) 161.595,143.021 ; U5.30@161.481,142.72 cw(c162.208,141.993) 162.208,143.021 ; U5.30@161.498,142.748 cw(c161.879,142.618) 161.879,143.021 ; U6.65@177.741,119.275 181.529,123.063 194.818,123.063 207.899,136.144 ; v1(178.308,137.795) 178.343,137.76 181,137.76 181.219,137.541 203.708,137.541 v1(207.01,140.843) ; v1@178.36,137.847 ccw(c178.569,138.056) 178.569,137.76 ; P4.50@208.818,135.726 ccw(c207.899,134.925) 207.899,136.144 ; P4.50@208.818,136.562 cw(c207.899,137.363) 207.899,136.144 ; P4.50@209.009,135.893 ccw(c208.458,135.413) 208.458,136.144 ccw(c208.458,136.875) P4.50@209.009,136.395 ; P4.50@209.296,136.144 207.899,136.144
  Bottom Layer w0.254: v1(170.942,142.748) 170.942,142.988 173.12,145.166 173.12,149.752 2.4/2.8LCD.15@174.752,151.384 175.895,152.527 177.725,152.527 178.406,151.846 178.406,137.697 v1@178.435,137.668 ; v1@171.015,142.748 cw(c171.77,142.748) 171.236,143.282 ; 2.4/2.8LCD.15@174.092,151.384 cw(c172.497,151.384) 173.625,150.257 cw(c174.752,149.129) 2.4/2.8LCD.15@174.752,150.724 ; 2.4/2.8LCD.15@174.346,151.384 cw(c173.364,151.384) 174.058,150.69 cw(c174.752,149.996) 2.4/2.8LCD.15@174.752,150.978 ; 2.4/2.8LCD.15@174.752,151.79 ccw(c174.752,152.772) 175.446,152.078 ccw(c176.14,151.384) 2.4/2.8LCD.15@175.158,151.384 ; 2.4/2.8LCD.15@174.752,152.044 ccw(c174.752,153.639) 175.879,152.511 ccw(c177.007,151.384) 2.4/2.8LCD.15@175.412,151.384 ; v1@178.256,137.847 ccw(c177.894,138.209) 178.406,138.209 ; v1(207.01,140.843) 207.01,138.43 P4.50@209.296,136.144 ; P4.50@208.661,136.144 ccw(c207.128,136.144) 208.212,137.228 ccw(c209.296,138.312) P4.50@209.296,136.779 ; P4.50@208.915,136.144 ccw(c207.995,136.144) 208.646,136.794 ccw(c209.296,137.445) P4.50@209.296,136.525
"FSMC D10": 2.4/2.8LCD.16 P4.49 U5.31 U6.66 | length 132.4
  Top Layer w0.254: v1(159.639,141.971) U5.31@160.729,141.971 169.403,141.971 169.799,142.367 v1(169.799,142.494) ; v1(162.687,124.841) v1(164.592,122.936) ; v1(168.402,127.381) 172.713,127.381 175.259,129.928 180.013,129.928 180.528,129.413 v1(190.373,129.413) v1@190.5,129.286 ; 169.585,142.153 ccw(c169.243,142.494) v1@169.726,142.494 ; U6.66@177.387,119.628 181.457,123.698 194.437,123.698 207.972,137.233 209.747,137.233 210.836,136.144 ; P4.49@211.261,135.874 ccw(c210.836,135.674) 210.836,136.144 ; P4.49@211.261,136.414 cw(c210.836,136.614) 210.836,136.144 ; P4.49@211.836,136.144 210.836,136.144
  Bottom Layer w0.254: v1(159.639,141.971) 161.686,141.971 162.433,141.224 162.433,131.71 162.376,131.653 162.376,125.152 v1(162.687,124.841) ; v1(164.592,122.936) 164.592,122.826 165.39,122.028 165.826,122.028 168.402,124.604 v1(168.402,127.381) ; v1@164.665,122.936 ccw(c165.107,122.936) 164.795,122.623 ; v1@169.799,142.367 v1(169.799,142.494) 169.799,142.748 170.615,143.564 170.876,143.564 172.666,145.354 172.666,150.262 173.326,150.922 173.326,152.498 2.4/2.8LCD.16@174.752,153.924 ; v1@169.872,142.494 cw(c170.661,142.494) 170.103,143.052 ; 2.4/2.8LCD.16@174.092,153.924 cw(c172.497,153.924) 173.625,152.797 cw(c174.752,151.669) 2.4/2.8LCD.16@174.752,153.264 ; 2.4/2.8LCD.16@174.346,153.924 cw(c173.364,153.924) 174.058,153.23 cw(c174.752,152.536) 2.4/2.8LCD.16@174.752,153.518 ; v1(190.373,123.698) v1(190.373,129.413)
"FSMC D11": 2.4/2.8LCD.17 P4.52 U5.32 U6.67 | length 123.4
  Top Layer w0.254: U5.32@160.729,141.171 169.746,141.171 v1(169.799,141.224) ; 169.496,141.171 ccw(c169.496,141.527) v1@169.747,141.276 ; U6.67@177.034,119.982 181.512,124.46 194.31,124.46 208.534,138.684 P4.52@209.296,138.684 ; v1(177.419,137.541) 177.781,137.541 178.054,137.268 180.338,137.268 180.376,137.306 180.812,137.306 181.031,137.087 202.257,137.087 v1(202.565,136.779) ; 203.875,134.025 ccw(c203.533,134.366) v1@204.016,134.366 ; v1@204.089,134.439 ccw(c204.089,134.922) 204.43,134.58 ; 206.911,137.061 cw(c209.296,134.676) P4.52@209.296,138.049 ; 207.345,137.495 cw(c209.296,135.544) P4.52@209.296,138.303 ; 207.778,137.928 cw(c209.296,136.411) P4.52@209.296,138.557 ; 208.212,138.362 cw(c209.296,137.278) P4.52@209.296,138.811
  Bottom Layer w0.254: v1(169.799,141.224) 170.163,141.224 173.574,144.635 173.574,149.444 174.244,150.114 176.022,150.114 2.4/2.8LCD.17@177.292,151.384 v1@177.292,137.414 ; 2.4/2.8LCD.17@176.632,151.384 cw(c175.037,151.384) 176.165,150.257 cw(c177.292,149.129) 2.4/2.8LCD.17@177.292,150.724 ; 2.4/2.8LCD.17@176.825,150.917 cw(c175.698,149.79) 177.292,149.79 cw(c178.886,149.79) 2.4/2.8LCD.17@177.759,150.917 ; 2.4/2.8LCD.17@176.886,151.384 cw(c175.904,151.384) 176.598,150.69 cw(c177.292,149.996) 2.4/2.8LCD.17@177.292,150.978 ; 2.4/2.8LCD.17@177.005,151.097 cw(c176.311,150.403) 177.292,150.403 cw(c178.273,150.403) 2.4/2.8LCD.17@177.579,151.097 ; 177.292,138.024 ccw(c177.902,138.024) v1@177.471,137.593 ; v1(202.565,136.779) 204.089,135.255 v1(204.089,134.366)
"FSMC D12": 2.4/2.8LCD.18 P4.51 U5.35 U6.68 | length 129.9
  Top Layer w0.254: v1(159.131,138.176) 159.726,138.771 U5.35@160.729,138.771 160.788,138.83 166.588,138.83 166.647,138.771 167.219,138.771 v1(167.386,138.938) ; 159.388,138.433 cw(c160.029,137.792) U5.35@160.029,138.698 ; 159.575,138.62 cw(c159.851,138.345) U5.35@160.001,138.704 ; U5.35@161.481,138.72 cw(c161.747,138.454) 161.747,138.83 ; v1(165.752,128.905) 173.595,128.905 175.071,130.382 180.201,130.382 180.274,130.309 188.969,130.309 v1(188.976,130.302) ; 166.808,138.771 ccw(c166.808,139.516) v1@167.334,138.99 ; v1(168.473,155.011) 168.529,155.067 176.149,155.067 2.4/2.8LCD.18@177.292,153.924 ; v1@168.524,154.959 cw(c168.785,154.698) 168.785,155.067 ; 2.4/2.8LCD.18@176.632,153.924 ccw(c175.037,153.924) 176.165,155.051 ccw(c177.292,156.179) 2.4/2.8LCD.18@177.292,154.584 ; U6.68@176.68,120.335 181.44,125.095 193.809,125.095 208.487,139.773 210.467,139.773 210.559,139.681 210.839,139.681 ; 2.4/2.8LCD.18@176.886,153.924 ccw(c175.904,153.924) 176.598,154.618 ccw(c177.292,155.312) 2.4/2.8LCD.18@177.292,154.33 ; P4.51@211.202,138.723 ccw(c209.957,138.799) 210.839,139.681 ; P4.51@211.456,138.707 ccw(c210.708,138.753) 211.238,139.282 ccw(c211.767,139.812) P4.51@211.813,139.064 ; P4.51@211.797,139.318 cw(c211.721,140.563) 210.839,139.681 ; P4.51@211.836,138.684 210.839,139.681
  Bottom Layer w0.254: v1@165.862,128.905 v1(165.752,128.905) 164.192,130.465 164.192,130.901 164.441,131.15 164.441,135.482 165.419,136.461 165.419,136.675 165.843,137.099 165.843,137.251 165.916,137.324 165.916,137.348 166.182,137.614 166.426,137.614 167.386,138.574 v1(167.386,138.938) 167.386,149.409 168.275,150.298 168.275,154.813 v1(168.473,155.011) ; 168.275,154.357 cw(c169.126,154.357) v1@168.524,154.959 ; v1(188.976,125.095) v1(188.976,130.302)
"FSMC D13": 2.4/2.8LCD.19 P5.50 U5.36 U6.77 | length 91.8
  Top Layer w0.254: P5.50@141.732,136.144 142.24,136.144 143.329,137.233 ; P5.50@141.755,136.269 ccw(c141.933,137.256) 142.643,136.547 ; P5.50@141.8,136.519 ccw(c142.039,137.837) 142.986,136.89 ; P5.50@141.845,136.769 ccw(c142.144,138.418) 143.329,137.233 ; v1(153.924,138.684) 155.067,138.684 156.102,137.649 159.349,137.649 159.672,137.971 U5.36@160.729,137.971 166.546,137.971 166.751,138.176 ; v1(166.37,138.303) 166.497,138.176 166.751,138.176 ; v1(166.37,149.352) 166.824,149.806 178.254,149.806 2.4/2.8LCD.19@179.832,151.384 ; v1@166.43,138.344 ccw(c166.751,138.566) 166.751,138.176 ; U6.77@170.316,120.335 162.765,127.886 157.102,127.886 147.755,137.233 143.329,137.233 ; 2.4/2.8LCD.19@179.172,151.384 cw(c177.577,151.384) 178.705,150.257 cw(c179.832,149.129) 2.4/2.8LCD.19@179.832,150.724 ; 2.4/2.8LCD.19@179.426,151.384 cw(c178.444,151.384) 179.138,150.69 cw(c179.832,149.996) 2.4/2.8LCD.19@179.832,150.978
  Bottom Layer w0.254: v1(153.035,131.953) 153.905,132.823 153.905,138.665 v1(153.924,138.684) ; 153.905,138.462 cw(c154.146,138.462) v1@153.976,138.632 ; 166.066,138.861 cw(c165.508,138.303) v1@166.297,138.303 ; v1(166.37,138.303) 166.37,138.557 165.989,138.938 165.989,147.701 166.37,148.082 v1(166.37,149.352)
"FSMC D14": 2.4/2.8LCD.20 P5.49 U5.37 U6.78 | length 89.5
  Top Layer w0.254: P5.49@144.272,136.144 147.447,136.144 156.337,127.254 158.149,127.254 158.327,127.432 162.512,127.432 U6.78@169.963,119.982 ; P5.49@144.541,135.875 cw(c145.192,135.224) 145.192,136.144 cw(c145.192,137.064) P5.49@144.541,136.413 ; P5.49@144.721,135.695 cw(c145.805,134.611) 145.805,136.144 cw(c145.805,137.677) P5.49@144.721,136.593 ; 154.599,128.992 cw(c154.257,128.651) v1@154.74,128.651 ; v1@154.813,128.578 cw(c154.813,128.095) 155.154,128.437 ; v1(154.94,138.049) 155.818,137.171 U5.37@160.729,137.171 160.737,137.179 164.429,137.179 164.437,137.171 165.492,137.171 165.608,137.287 v1(165.227,137.287) ; 164.772,137.171 ccw(c164.772,137.742) v1@165.175,137.339 ; v1(166.37,150.241) 166.399,150.27 177.754,150.27 178.406,150.922 178.406,152.498 2.4/2.8LCD.20@179.832,153.924 ; v1@166.422,150.189 cw(c166.615,149.996) 166.615,150.27
  Bottom Layer w0.254: v1@154.774,128.713 ccw(c154.557,129.051) 154.959,129.051 ; v1(154.813,128.651) 154.959,128.797 154.959,129.051 ; 154.813,128.905 154.959,129.051 ; v1@154.881,128.678 cw(c155.205,128.805) 154.959,129.051 ; v1@154.888,137.997 cw(c154.718,137.827) 154.959,137.827 ; v1(154.94,138.049) 154.959,138.03 154.959,129.051 ; v1(165.227,137.287) 165.462,137.522 165.462,149.206 v1@166.37,150.114 ; 166.156,149.9 ccw(c165.814,150.241) v1@166.297,150.241
"FSMC D15": 2.4/2.8LCD.21 P5.48 U5.38 U6.79 | length 96
  Top Layer w0.254: P5.48@141.732,133.604 141.732,133.712 142.757,134.738 147.71,134.738 156.718,125.73 159.639,125.73 160.24,126.331 162.907,126.331 U6.79@169.609,119.628 ; P5.48@141.732,134.239 ccw(c141.732,135.511) 142.632,134.612 ; P5.48@142.112,133.637 cw(c143.009,133.715) 142.372,134.352 ; P5.48@142.365,133.659 cw(c143.718,133.777) 142.757,134.737 ; v1(154.432,137.668) 155.729,136.371 U5.38@160.729,136.371 164.438,136.371 ; 163.357,136.371 ccw(c163.357,137.506) v1@164.159,136.704 ; 163.971,136.371 ccw(c163.971,136.892) v1@164.339,136.524 ; v1(164.211,136.652) 164.211,136.599 164.438,136.371 ; v1(164.438,149.833) 165.447,148.825 170.978,148.825 171.505,149.352 180.467,149.352 182.372,151.257 2.4/2.8LCD.21@182.372,151.384 ; 164.592,136.525 164.438,136.371 ; 181.155,150.04 ccw(c179.811,151.384) 2.4/2.8LCD.21@181.712,151.384 ; 181.461,150.346 cw(c182.372,149.436) 2.4/2.8LCD.21@182.372,150.724 ; 181.588,150.473 ccw(c180.678,151.384) 2.4/2.8LCD.21@181.966,151.384
  Bottom Layer w0.254: v1(153.035,129.413) 154.432,130.81 v1(154.432,137.668) ; v1@164.159,136.704 ccw(c163.95,136.913) 164.246,136.913 ; v1(164.211,136.652) 164.246,136.687 164.246,137.693 164.438,137.886 v1(164.438,149.833) v1@164.465,149.86